# Altium PCB NE555_PWM_Generator_PCB.PcbDoc
Units mil, origin at the board's own origin, x right, y up, seen from the top; angles counter-clockwise.
Board outline 1574.8 x 1279.53 mil, 2 copper layers (Top Layer, Bottom Layer); 9 components, 10 nets, 31 pads, 0 vias.
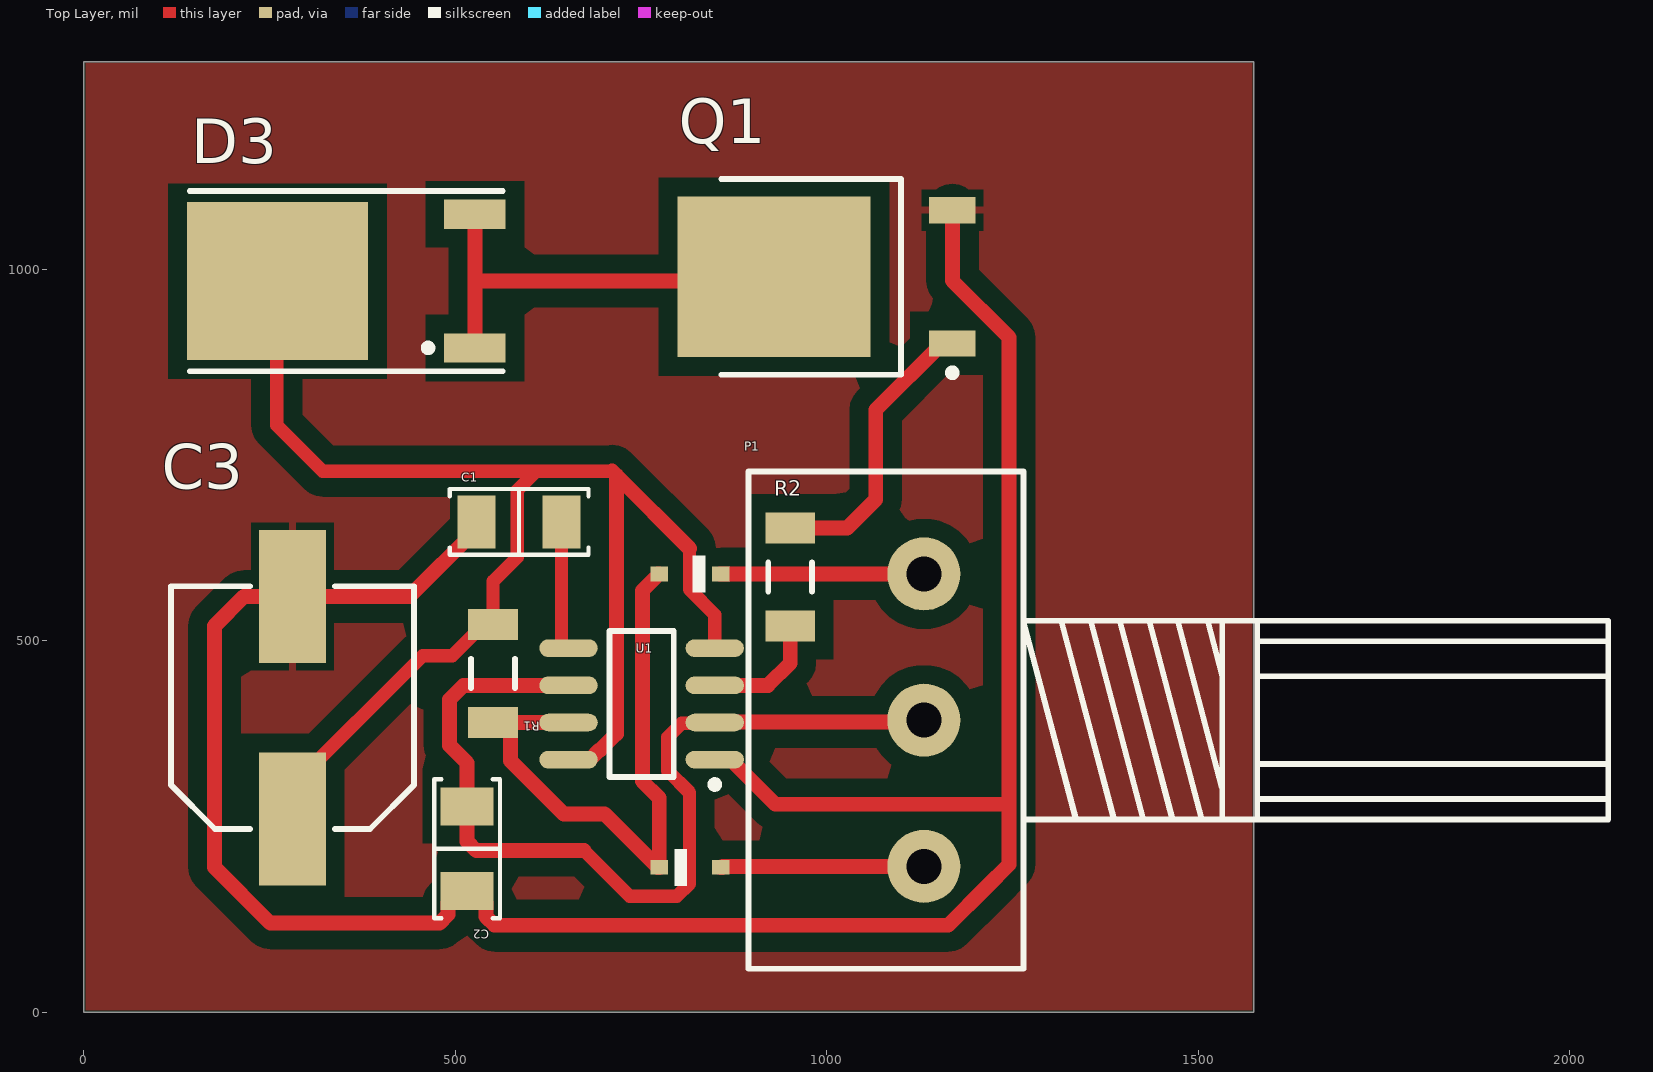
[diagram p0: Top Layer view]
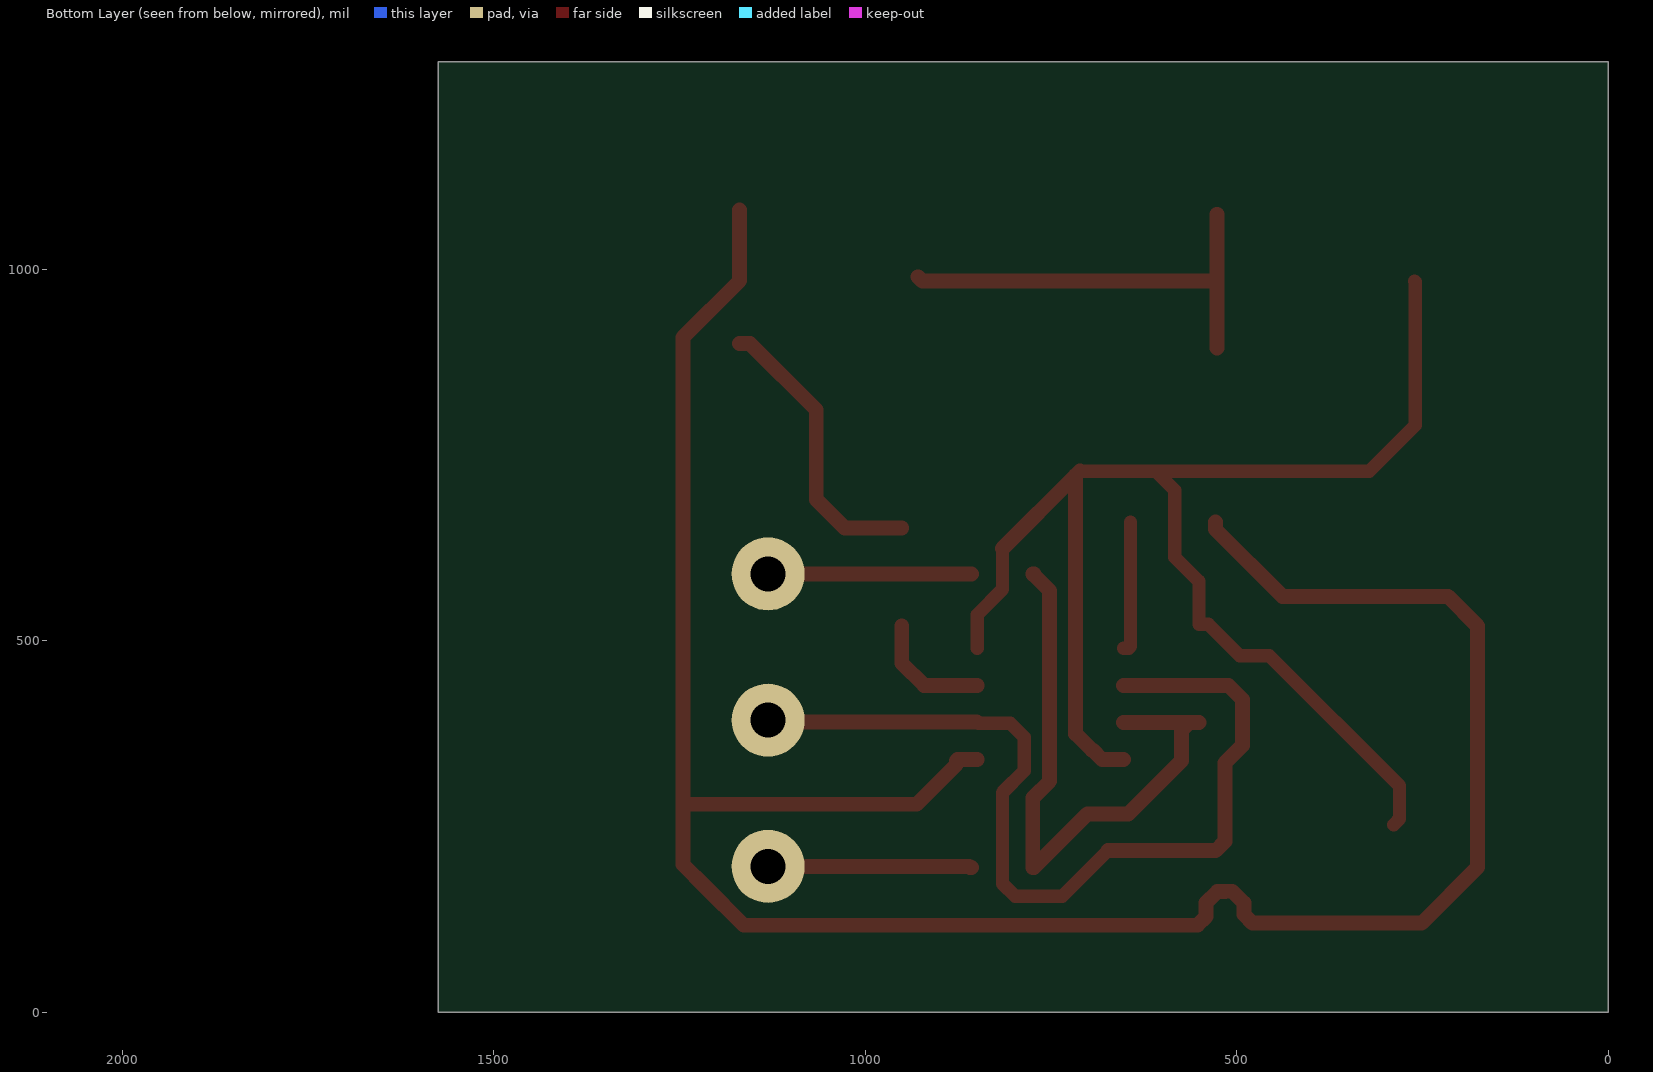
[diagram p1: Bottom Layer view, seen from below]
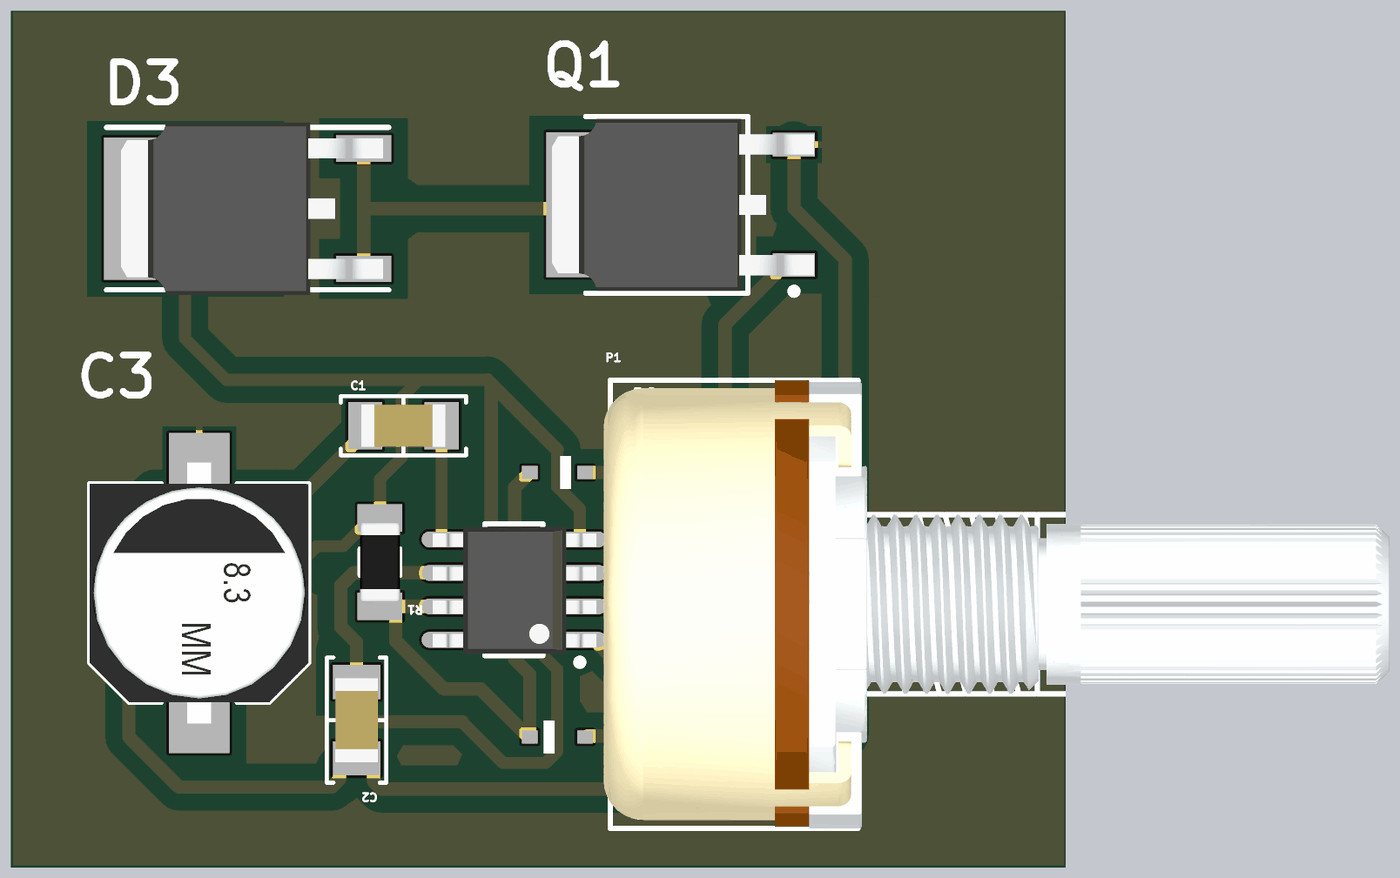
[diagram p2: 3D render of the assembled board from above, using the file's embedded part models]

## Layer stack, top to bottom
Top Solder: solder mask 0.4, Solder Resist, Dk 3.5
Top Layer: signal copper 1.4
Dielectric 1: dielectric 12.6, FR-4, Dk 4.8
Bottom Layer: signal copper 1.4
Bottom Solder: solder mask 0.4, Solder Resist, Dk 3.5

## Board outline
0,0 0,1279.53 1574.8,1279.53 1574.8,0

## Design rules (kind name [scope] priority, off if disabled: settings)
Clearance [All] p1: gap=15 ignorepadtopadclearanceinfootprint=FALSE except(25: Arc-Poly Track-Poly SMDPad-Poly THPad-Poly Via-Poly Fill-Poly Poly-Poly Poly-Region Poly-Text Poly-Hole)
PolygonConnect [All] p1: connectstyle=Relief reliefconductorwidth=10 reliefentries=4 polygonreliefangle="90 Angle" airgapwidth=10
RoutingVias [All] p1: holewidth=28 width=50 viastyle="Through Hole" minholewidth=28 minwidth=50 maxholewidth=28 maxwidth=50
SolderMaskExpansion [All] p1: expansion=4 istentingtop=FALSE
SupplyNets "Schematic Supply Nets_1" [InNet('GND')] p1: voltage=0.000
SupplyNets "Schematic Supply Nets" [InNet('+12')] p2: voltage=0.000
Width [All] p1: maxlimit=40 minlimit=18 preferedwidth=20 bottomlayer_minwidth=20 minimp=50.000000 maximp=50.000000 favimp=50.000000
30 further rules are at their usual default settings.

## Components (designator, comment, footprint, x,y, rotation, side; value= is the part's Value field where it differs from the comment)
C1 "100nF" "CAP 1206/3216" 586.02,660 r180 top
C2 "1nF" "CAP 1206/3216" 516.02,220 r270 top
C3 "470uF" "CAP ALUM 8.3MM" 281.02,410 r90 top
D3 "SDT30B100D1-13" 50WQ03 393.7,984.25 r90 top
P1 "50K" POT_WH148 1131.02,393.15 r90 top value=Value?
Q1 "AOD472" TO252-3L 1000,990 r180 top
R1 "1K" "RES 1206 (3216X08L)" 551.02,405 r90 top
R2 "47R" "RES 1206 (3216X08L)" 951.02,637.05 r270 top
U1 "NE555" SO8_narrow_n 751.02,415 r180 top

## Footprints (in the part's own frame and the unit in brackets; to place one, negate y for a bottom-side part, rotate by r counter-clockwise, add the part's x,y. Pads: shape width x height; smd on the part's side, far side on the other; paste and mask are expansions set on the pad)
50WQ03 [mm] "D-PAK/TO-252-AA; 3 Leads (1 Cropped); Body 10.1 (inc. leads) x 6.6 mm (LxW max)"
  rect 1x2.1 smd: 1(-2.285,-3.375) 1(2.285,-3.375)
  rect 5.4x6.2 smd: 2(0,3.375)
  silkscreen extent -3.08,-4.33 3.09,6.38, body extent -3.27,-4.11 3.27,5.83, height 2.39
"CAP 1206/3216" [mm] "Chip Capacitor, 2-Leads, Body 3.25x1.60mm, IPC Medium Density"
  rect 1.3x1.8 smd: 1(-1.45,0) 2(1.45,0)
  silkscreen extent -2.37,-1.12 2.37,1.12, body extent -1.6,-0.81 1.6,0.81, height 1.62
"CAP ALUM 8.3MM" [mm] "Aluminum Electrolytic Capacitor, Body 8.30x8.30x10.50mm, IPC Low Density"
  rect 4.55x2.3 smd: 1(-3.8,0) 2(3.8,0)
  silkscreen extent -4.15,-4.15 4.15,4.15, body extent -4.95,-4.15 4.95,4.15, height 10.5
POT_WH148 [mm] "Chip Variable Resistor, 3-Leads, Body 5x5x5mm"
  round 2.5 hole 1.2: 1(-5,0) 2(0,0) 3(5,0)
  silkscreen extent -8.5,-23.4 8.5,6, body extent -8.5,-23.55 8.5,6.25, height 21.5
"RES 1206 (3216X08L)" [mm] "Chip Resistor, 2-Leads, Body 3.2x1.6mm, IPC High Density _ (0.125 W)"
  rect 1.05x1.7 smd: 1(-0.377,0) 2(2.973,0)
  silkscreen extent 0.8,-0.75 1.8,0.75, body extent -0.23,-0.76 2.82,0.76, height 0.6
SO8_narrow_n [mm] "8-Pin Small Outline Package (SO8), IPC Medium Density"
  oval 2x0.6 smd: 1(-2.5,1.905) 2(-2.5,0.635) 3(-2.5,-0.635) 4(-2.5,-1.905) 5(2.5,-1.905) 6(2.5,-0.635) 7(2.5,0.635) 8(2.5,1.905)
  silkscreen extent -2.63,-2.5 1.1,2.88, body extent -3.12,-2.39 3.07,2.44, height 1.7
TO252-3L [mm] "D-PAK, 3-Pads, Body 6.2x6.7mm (max), IPC High Density"
  rect 1.6x0.9 smd: 1(-4.3,2.28) 3(-4.3,-2.28)
  rect 6.6x5.5 smd: 4(1.8,0)
  silkscreen extent -4.43,-3.35 3.6,3.4, body extent -5.06,-3.27 4.88,3.27, height 2.39

## Part data
C1 C2: library part Cap_Multi_SMD, "Bipolar ceramic capacitor SMD", Package=Package?, Rating=Rating?, Type=Type?, Validation=Valid, Inflow=inflow?
C3: library part Cap_Electrolit_SMD, "Electrolit Capacitor SMD", Package=SMD, Rating=SC1C477M08010VR, Type=Electrolit, Validation=Valid, Inflow=inflow?
D3: library part Semi_Diod_Sch_50WQ03, "Fast soft recovery power rectifier", Package=TO-252, Rating=Rating?, Type=Schottky, Validation=NT, Inflow=inflow?
P1: library part Res_Pot, "Potentiometer", Package=Package?, Rating=Rating?, Type=Type?, Validation=Valid, Inflow=50K
Q1: library part Semi_MOSFET_AOD472, "N-channel MOSFET", Package=Package?, Rating=Rating?, Type=Type?, Validation=NT, Inflow=STD30NF06LT4
R1 R2: library part Res_SMD, "Resistor", Package=Package?, Rating=Rating?, Type=10%, Validation=Valid, Inflow=inflow?
U1: library part IC_Timer_NE555_SMD, "Astable or monostable operation timer", Package=Package?, Rating=Rating?, Type=Type?, Validation=Valid, Inflow=8109

## Free pads (board coordinates)
  rect 23.62x19.68 smd paste+0 mask+4.02: A(774.68,590) A(857.36,195) C(774.68,195) C(857.36,590)

## Nets (pads, with @x,y where several pads share a name; then routed paths per layer and width w, separated by ;. In a path a pad name is that pad's centre, name@x,y a point inside that pad or via, vN(x,y) a via of type N, cw(c..) or ccw(c..) an arc to the next point about the centre after c; other vN are vias at no path point)
+12: C3.1 D3.2 R1.2 U1.4 U1.8 | length 2039.8
  Top Layer w18: D3.2 260,983.43 260,790 321.64,728.36 609.44,728.36 ; C3.1@288.92,252.5 C3.1 281.02,304.69 456.17,479.83 496.01,479.83 538.23,522.05 R1.2 551.02,580.05 583.53,612.55 583.53,702.45 609.44,728.36 ; 711.38,728.36 609.44,728.36 ; 815.5,624.24 815.5,569.2 849.45,535.25 U1.4
  Top Layer w20: U1.8 681.14,340 694.33,353.19 695.41,353.19 716.97,374.75 716.97,722.77 ; 711.38,728.36 716.97,722.77 ; 815.5,624.24 716.97,722.77
GND: C1.2 C2.2 C3.2 Q1.3 U1.1 | length 3265.5
  Top Layer w20: C2.2@516.02,162.38 526.4,162.38 541.46,147.32 541.46,128.72 553.17,117 1163.75,117 1216.02,169.28 1244.37,197.63 ; C2.2 506.18,162.91 490.59,147.32 490.59,131.72 478.87,120 251.22,120 176.02,195.2 176.02,520 215.63,559.61 C3.2 438.39,559.61 528.94,650.16 C1.2 ; U1.1 876.03,340 877.7,338.33 877.7,333.32 931.02,280 1245.79,280 1245.79,199.04 ; Q1.3 1169.29,984.8 1245.79,908.31 1245.79,282
NetC1_1: C1.1 U1.5 | length 178
  Top Layer w18: C1.1 643.11,492.6 645.71,490 U1.5
NetC2_1: C2.1 P1.2 U1.2 U1.6 | length 1269.6
  Top Layer w18: 673.52,217.5 735.02,156 798.35,156 815.5,173.15 815.5,295.75 786.08,325.17 786.08,370.06 804.95,388.92 848.37,388.92 U1.2@850.14,390.69
  Top Layer w20: U1.6 511.38,440 492.56,421.18 492.56,359.13 516.02,335.67 516.02,230 528.52,217.5 673.52,217.5 ; U1.2@850.14,390.69 1128.57,390.69 P1.2
NetD1_A: pad.A@774.68,590 pad.C@774.68,195 R1.1 U1.7 | length 844.8
  Top Layer w20: U1.7 652.52,390.08 551.1,390.08 R1.1 563.82,390.16 574.49,379.49 574.49,338.49 646.16,266.82 701.21,266.82 773.03,195 774.68,195 774.68,288.48 752.08,311.08 752.08,567.39 772.87,588.19 772.87,589.84 773.03,590 pad.A@774.68,590
NetD1_C: P1.3 pad.C@857.36,590 | length 273.7
  Top Layer w20: pad.C@857.36,590 P1.3
NetD2_A: P1.1 pad.A@857.36,195 | length 274.2
  Top Layer w20: pad.A@857.36,195 859.02,195 860.31,196.3 P1.1
NetD3_1: D3.1 Q1.4 | length 584.9
  Top Layer w20: D3.1@526.57,894.29 526.57,984.25 ; D3.1@526.57,1074.21 526.57,984.25 ; Q1.4 923.39,984.25 526.57,984.25
NetQ1_1: Q1.1 R2.1 | length 391.9
  Top Layer w20: R2.1 1027.91,651.89 1066.26,690.24 1066.26,810.98 1155.51,900.24 Q1.1
NetR2_2: R2.2 U1.3 | length 164
  Top Layer w20: U1.3 921.02,440 951.02,470 R2.2

## Polygon pours and split planes (outlines as drawn)
GND on Top Layer "GND_L01_P000" (solid, pour order 0): 3,3 3,1278 1573,1278 1573,3

## Silkscreen, mask and mechanical layers (free items; w line width, h text height)
Top Overlay:
  region: 812.09,170.39 795.35,170.39 795.35,219.61 812.09,219.61
  region: 819.96,614.61 836.7,614.61 836.7,565.39 819.96,565.39
Mechanical 13:
  lines w5: 782.56,169.41 782.56,220.59 ; 782.56,564.41 782.56,615.59 ; 849.49,169.41 849.49,220.59 ; 849.49,564.41 849.49,615.59
Mechanical 15:
  lines w5: 751.06,159.57 880.98,159.57 880.98,230.43 751.06,230.43 751.06,159.57 ; 751.06,554.57 880.98,554.57 880.98,625.43 751.06,625.43 751.06,554.57